# Altium PCB AC-DC24.PcbDoc
Units mm, origin at the board's own origin, x right, y up, seen from the top; angles counter-clockwise.
Board outline 88.02 x 101.24 mm, 4 copper layers (Top Layer, Layer 1, Layer 2, Bottom Layer), stack 0.603 mm thick; 34 components, 23 nets, 97 pads, 158 vias.
Unrouted connection lines stored in the file: 1.
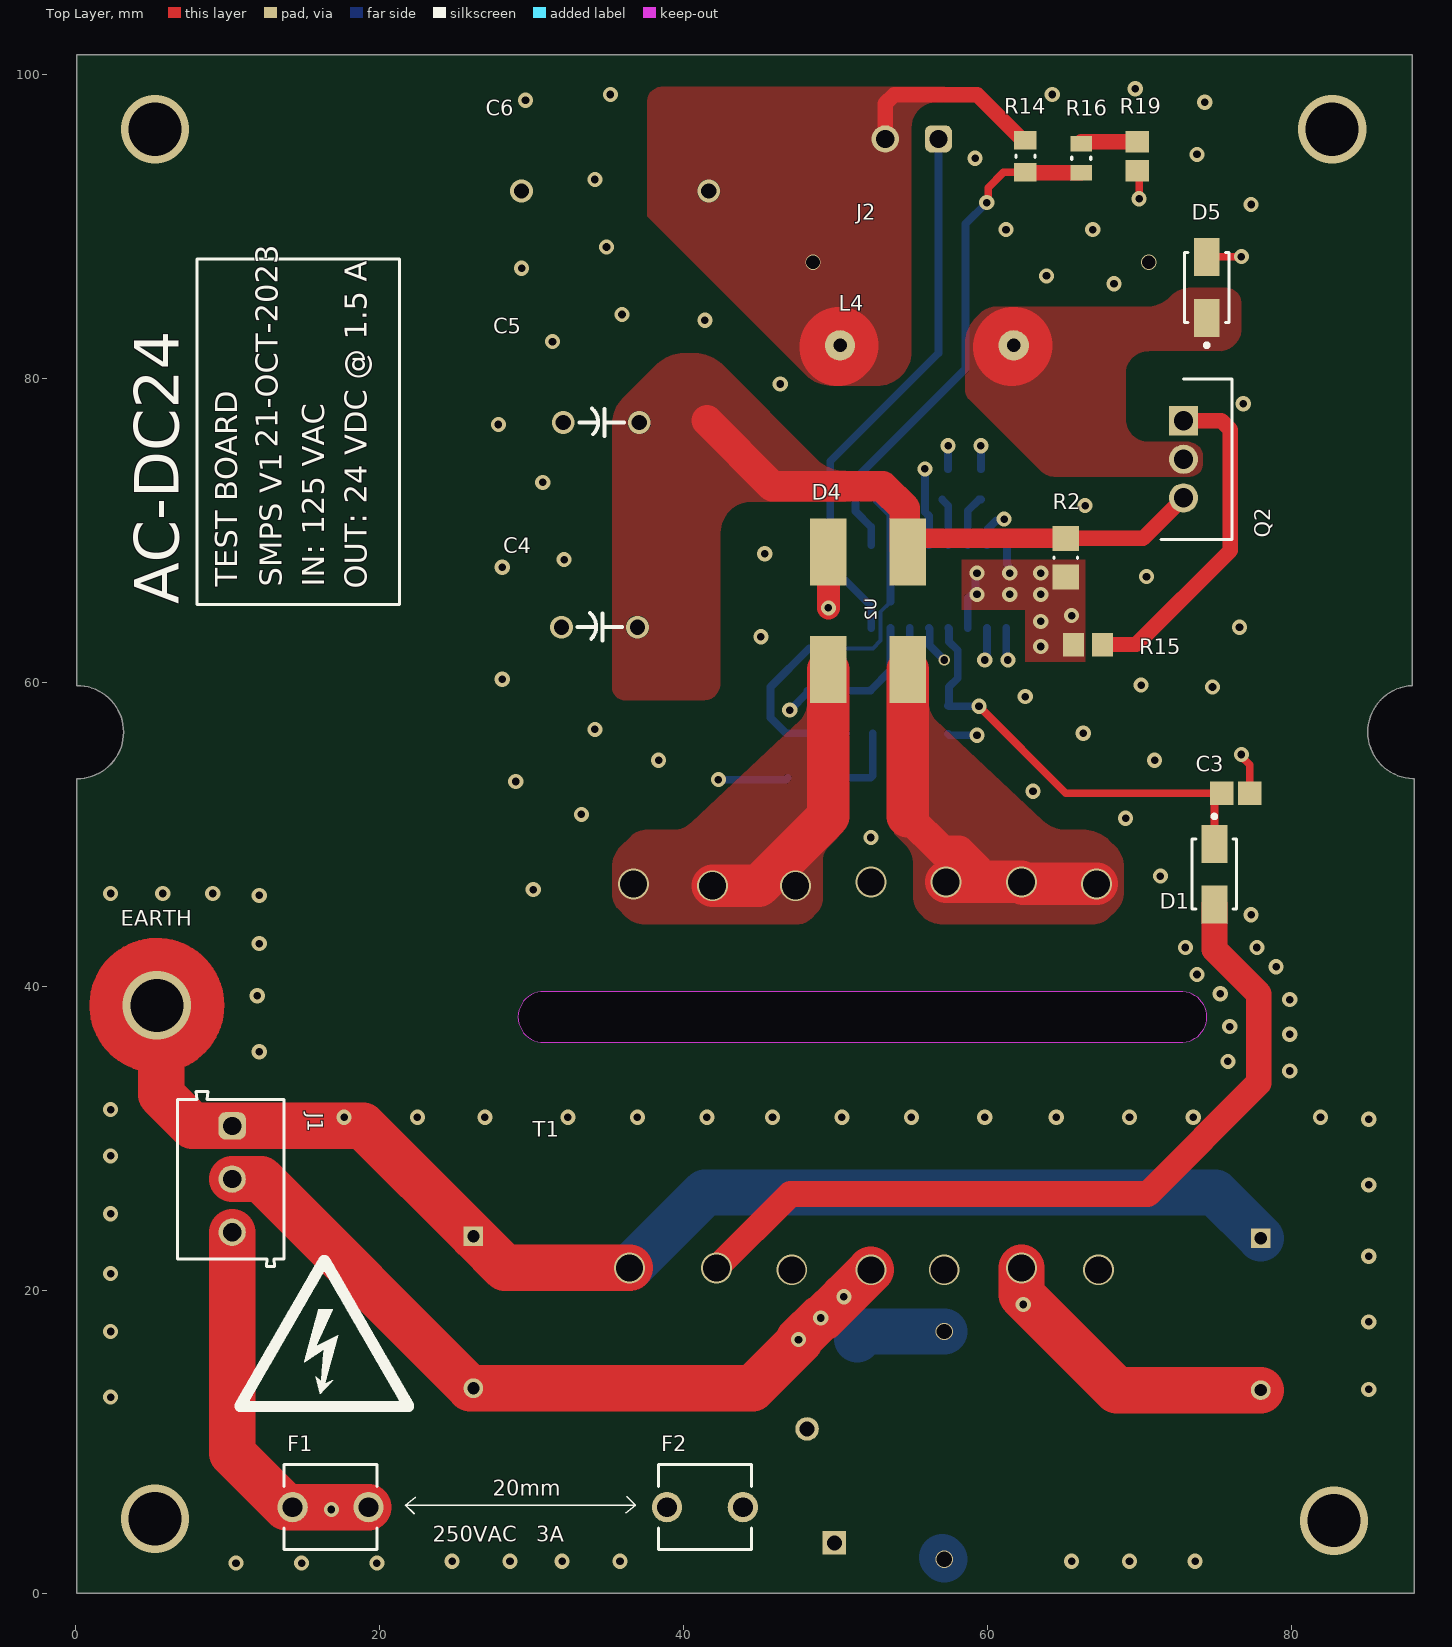
[diagram p0: Top Layer view]
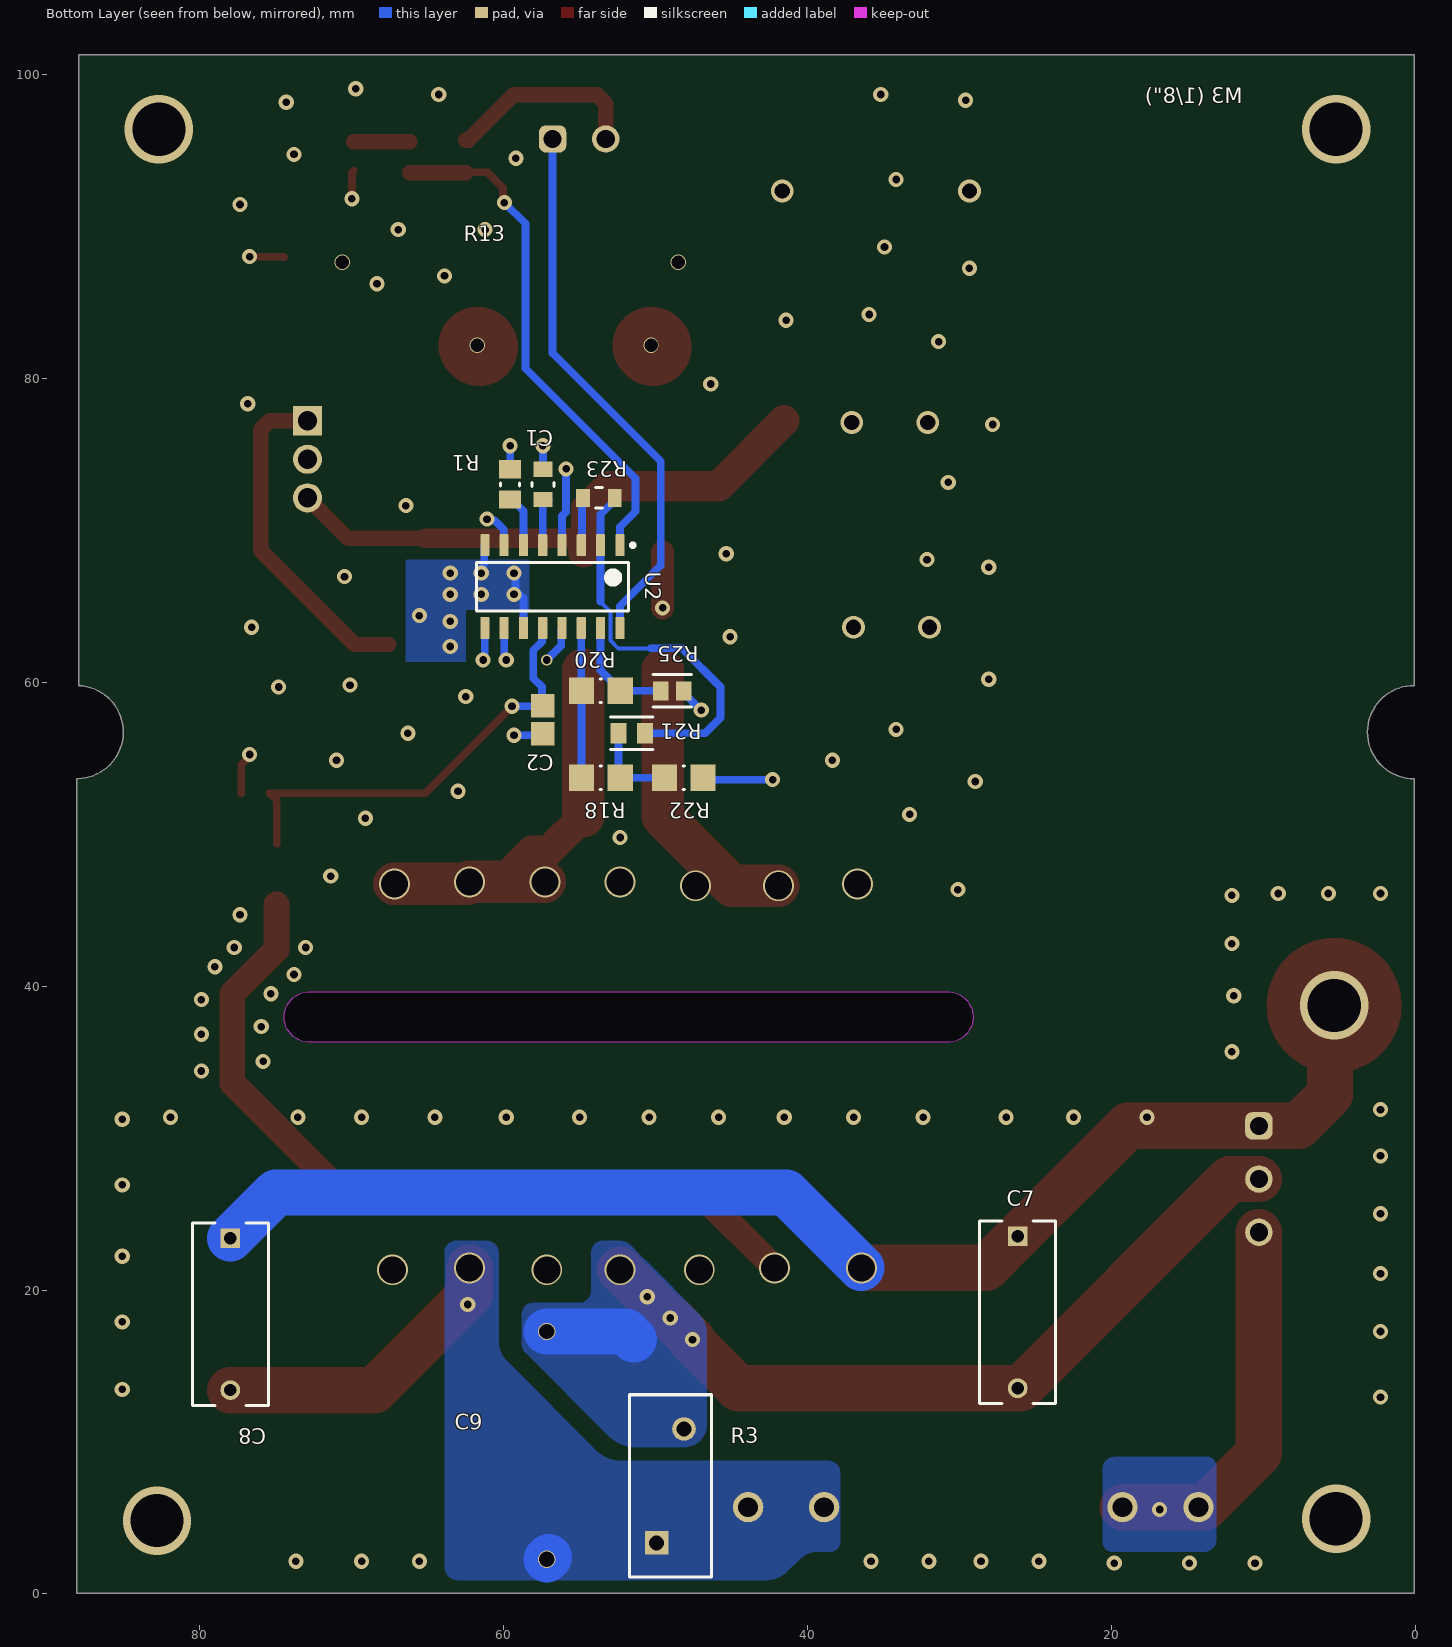
[diagram p1: Bottom Layer view, seen from below]
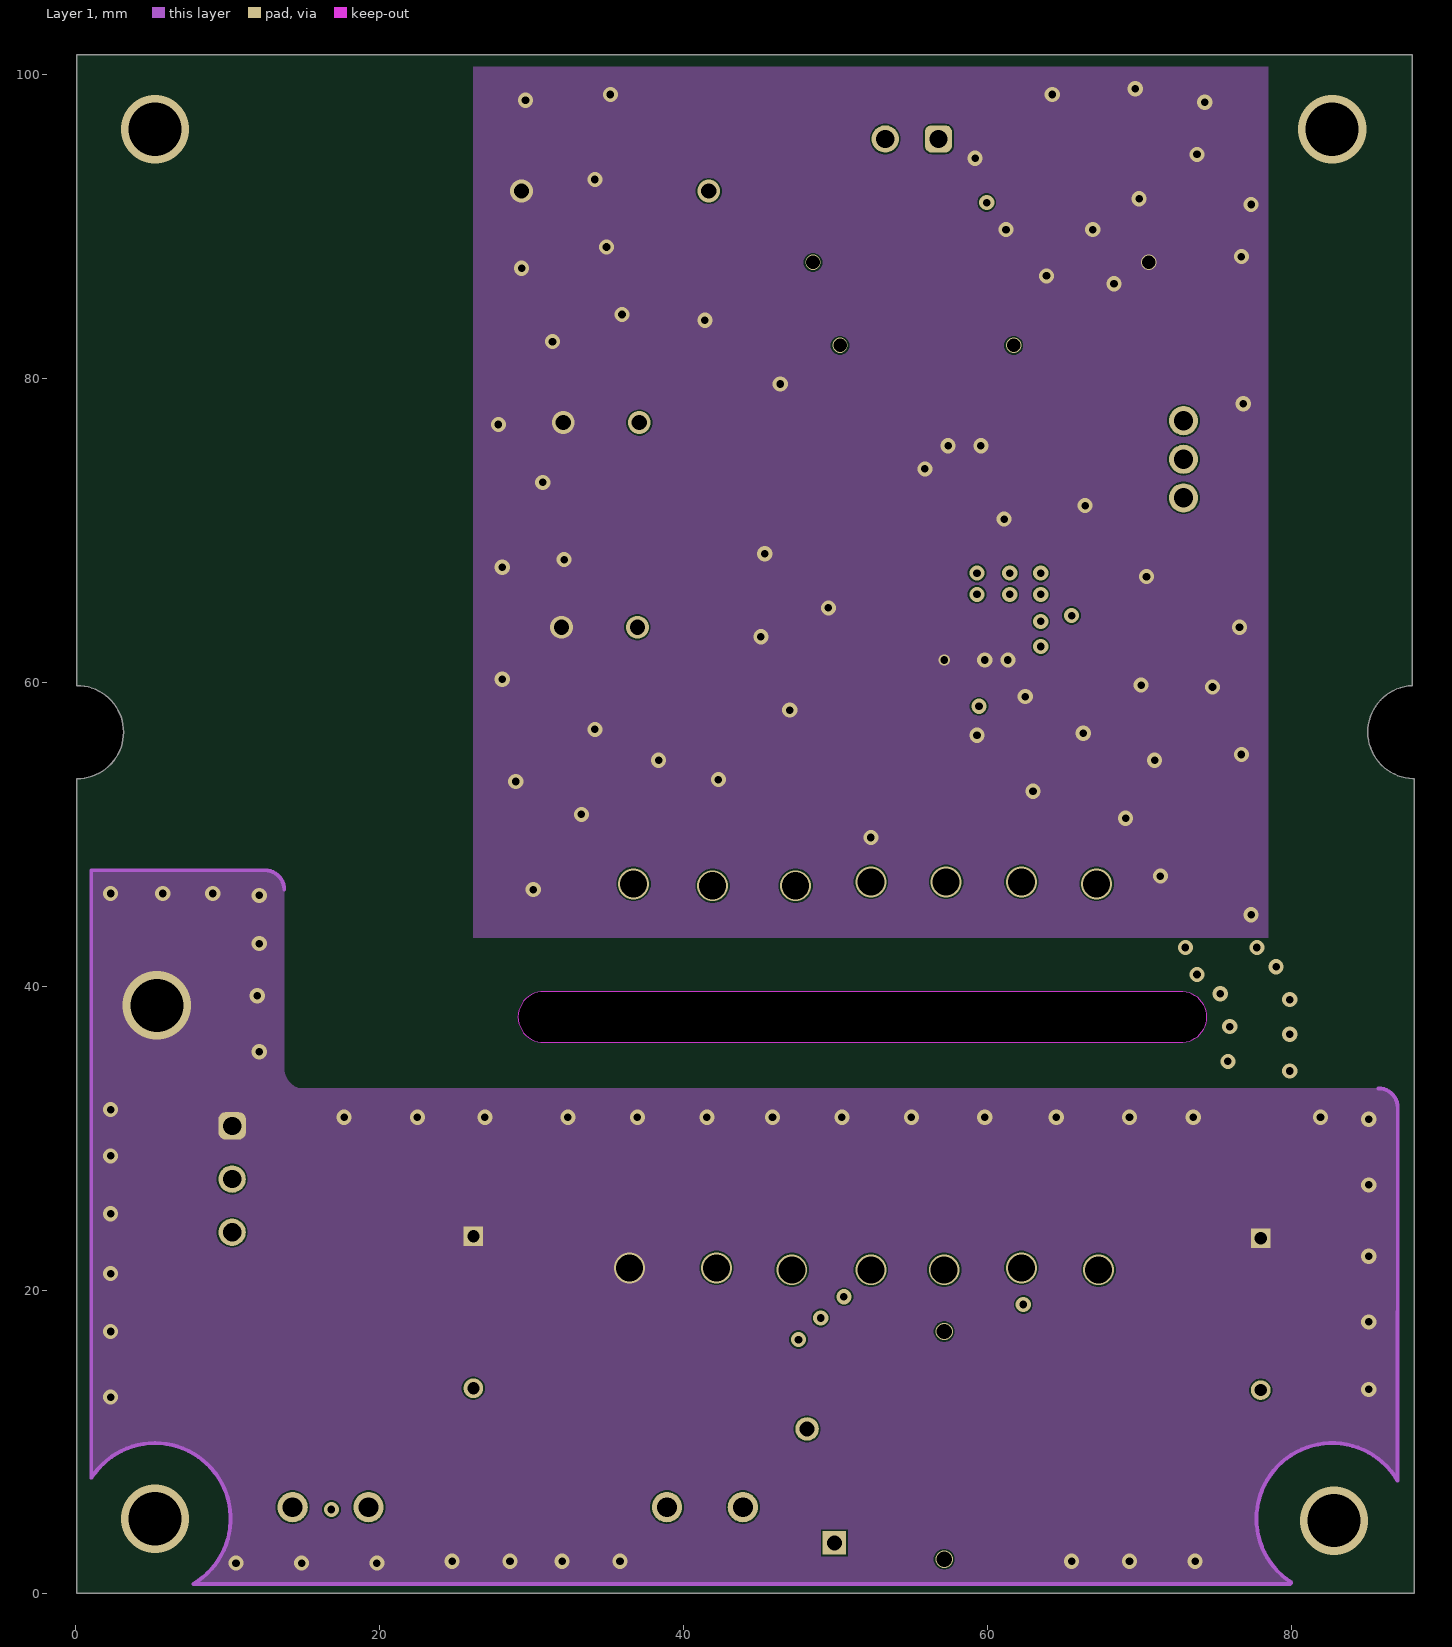
[diagram p2: Layer 1]
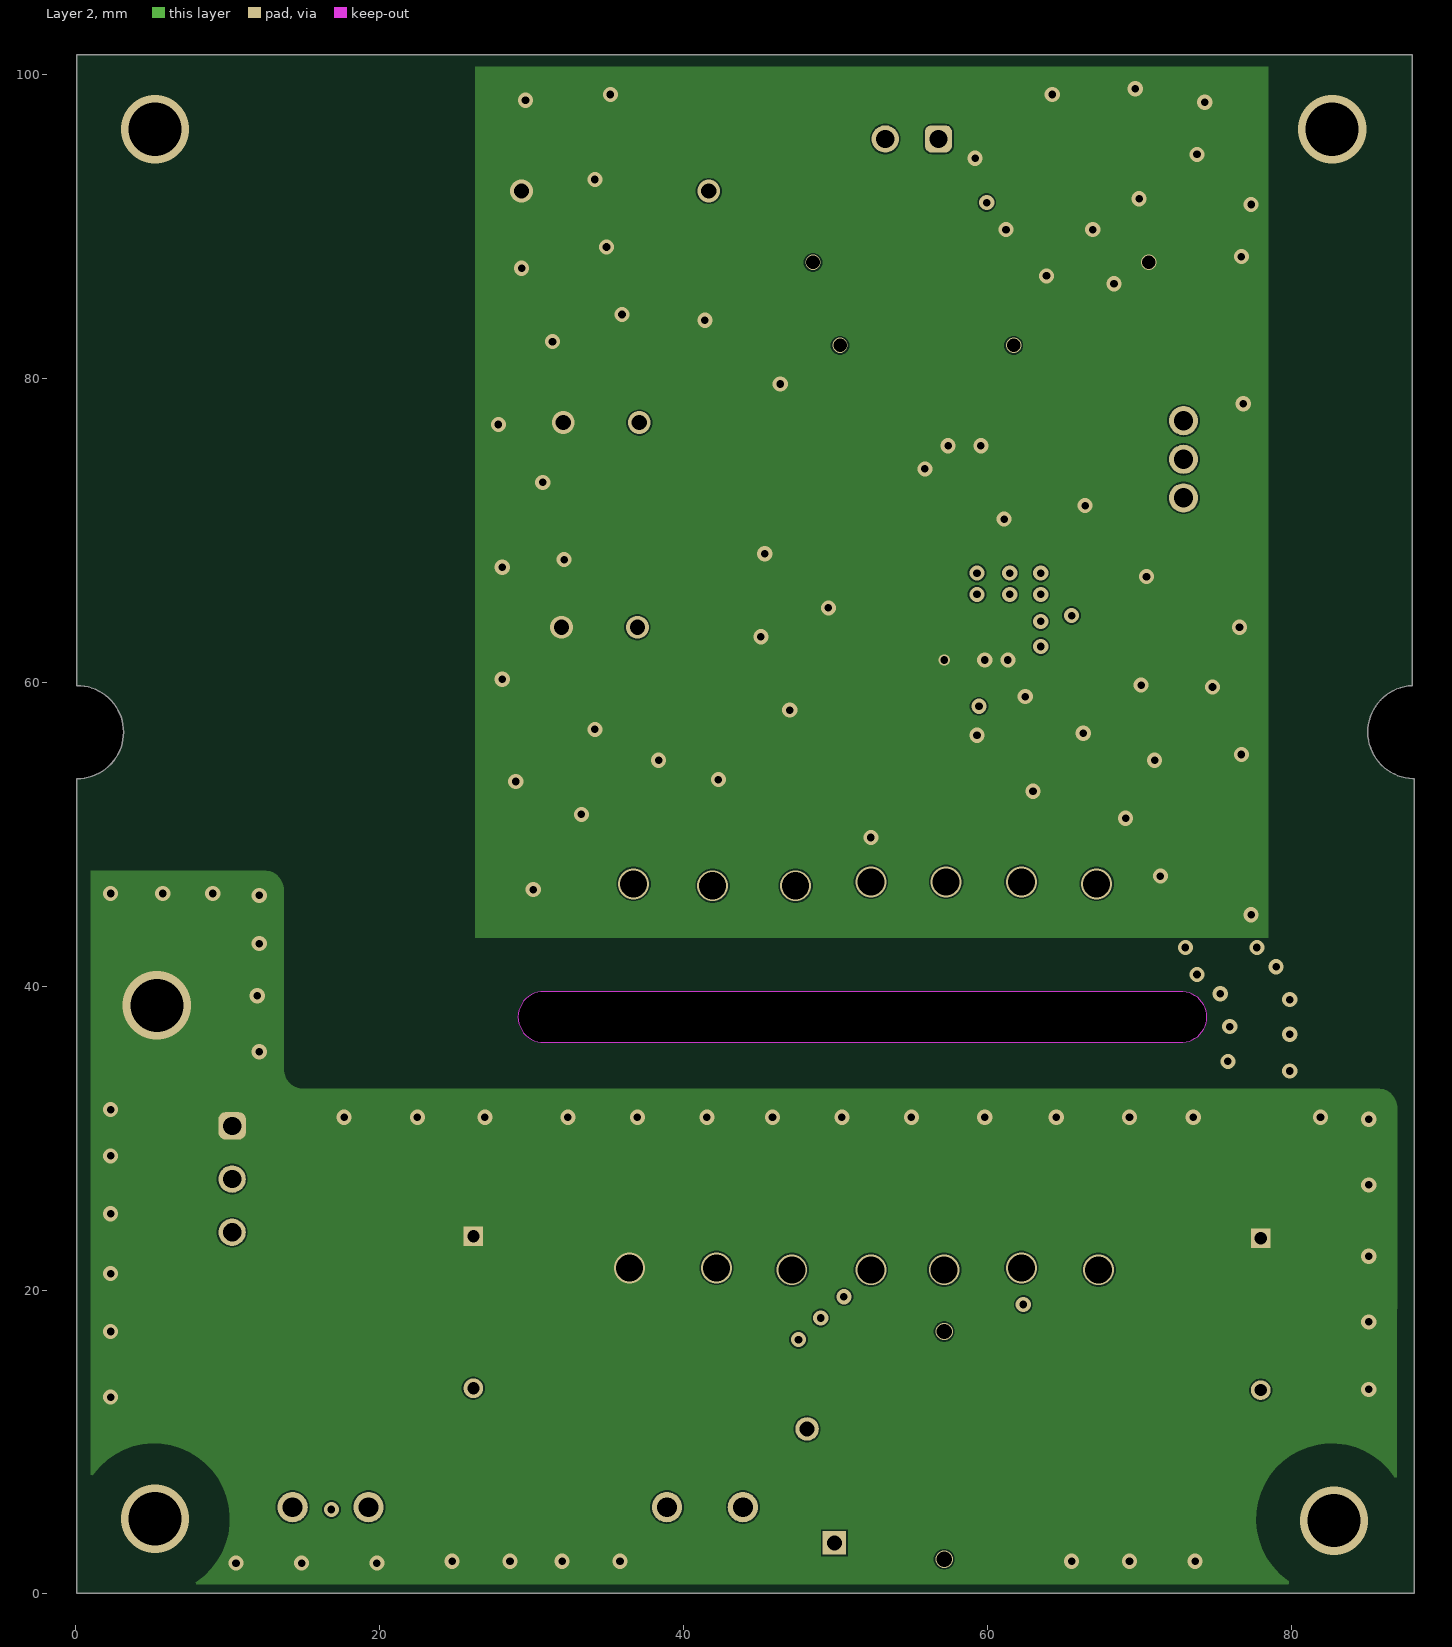
[diagram p3: Layer 2]
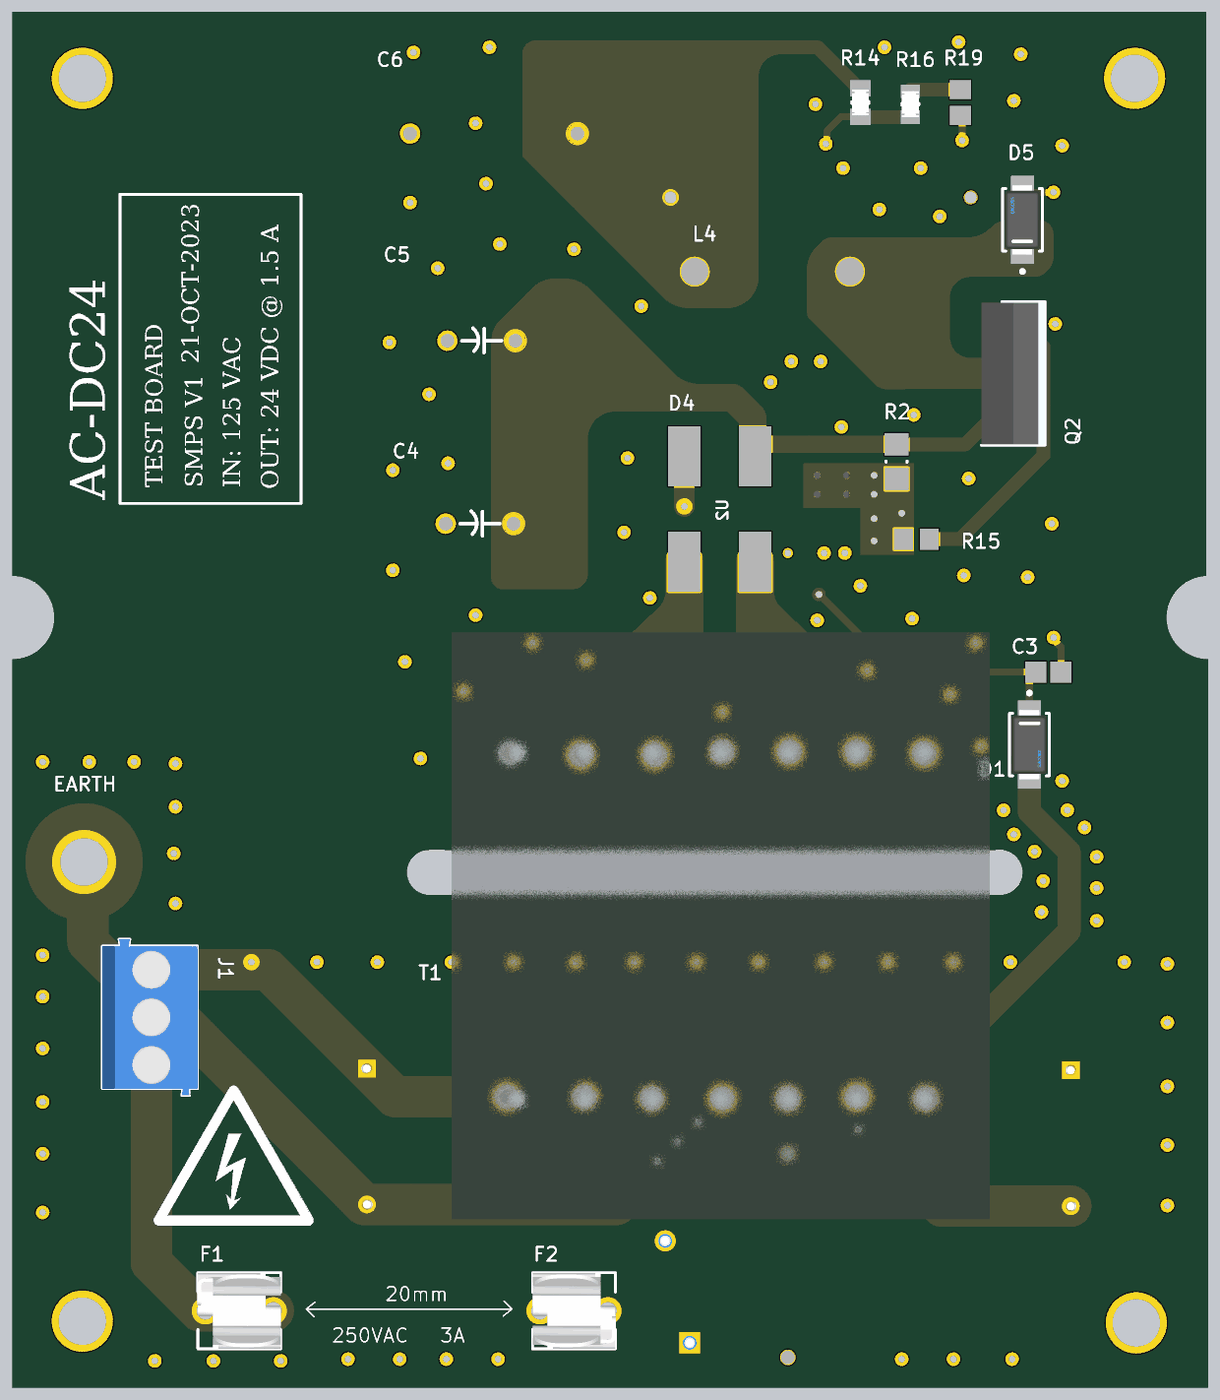
[diagram p4: 3D render of the assembled board from above, using the file's embedded part models]
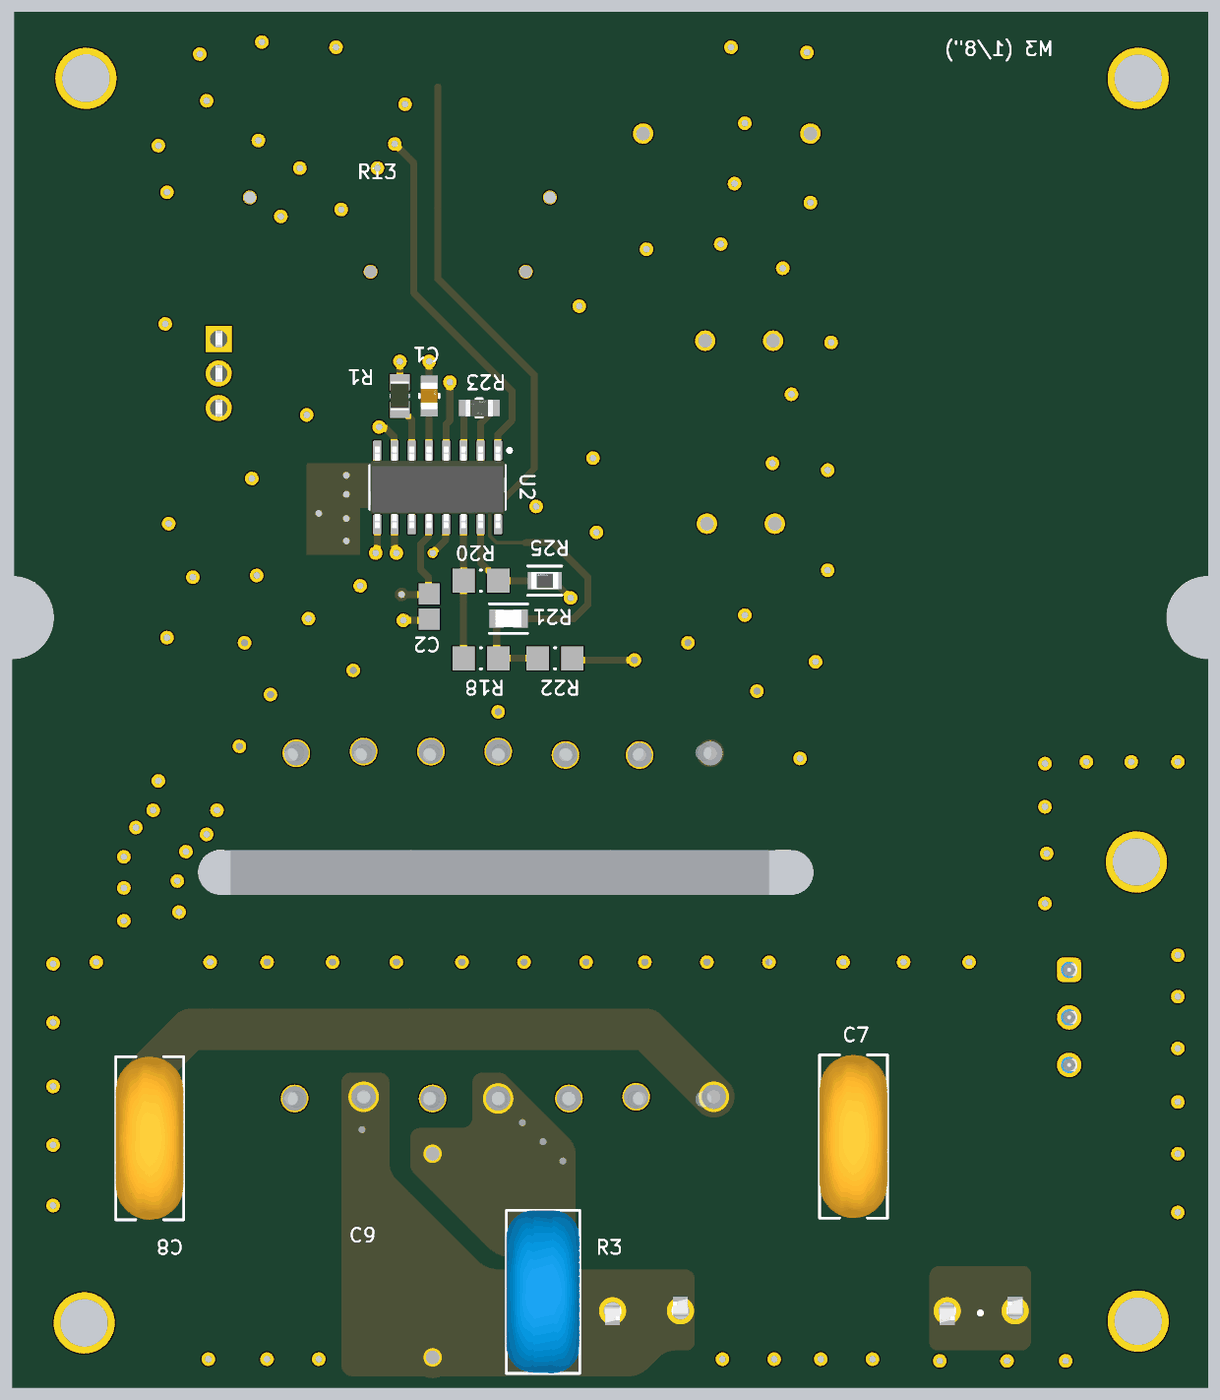
[diagram p5: 3D render of the assembled board from below, using the file's embedded part models]

## Layer stack, top to bottom
Top Solder: solder mask 0.0102, Solder Resist, Dk 3.5
Top Layer: signal copper 0.0356
Dielectric 2: prepreg 0.0711, PP-006, Dk 4.1
Layer 1: signal copper 0.035
Dielectric 1: dielectric 0.32, FR-4, Dk 4.8
Layer 2: signal copper 0.035
Dielectric 3: prepreg 0.0711, PP-006, Dk 4.1
Bottom Layer: signal copper 0.0356
Bottom Solder: solder mask 0.0102, Solder Resist, Dk 3.5

## Board outline
0.064,0.051 0.064,53.657 ccw(c0.079,56.721) 3.143,56.721 ccw(c0.079,56.721) 0.064,59.785 0.064,101.295 87.947,101.295 87.947,59.782 ccw(c88.087,56.721) 88.002,53.658 88.082,53.657 88.082,0.064 87.973,0.051
cut-out: 30.612,36.321 72.644,36.321 ccw(c72.776,37.973) 74.433,37.973 ccw(c72.776,37.973) 72.644,39.624 33.406,39.624 30.612,39.624 ccw(c30.756,37.973)

## Design rules (kind name [scope] priority, off if disabled: settings)
Clearance [All] p1: gap=0.102 ignorepadtopadclearanceinfootprint=TRUE
Clearance Clearance_1 [InNet('sec+') vs InNet('sec+')] p2: gap=0 ignorepadtopadclearanceinfootprint=TRUE
ComponentClearance [All] p1: gap=0.025 collisioncheckmode=3 verticalgap=0.025 showdistances=FALSE donotcheckwithout3dbody=TRUE
Height [All] p1: minheight=0 maxheight=100 prefheight=10
PlaneConnect PlaneConnect_1 [All] p1: planeconnectstyle=Relief reliefexpansion=0.508 reliefentries=4 reliefconductorwidth=0.254 reliefairgap=0.254
PolygonConnect [InNet('vout') vs IsNamedPolygon('NetC24_2_P')] p1: connectstyle=Direct reliefconductorwidth=0.254 reliefentries=4 polygonreliefangle="90 Angle" airgapwidth=0.254
PolygonConnect PolygonConnect_19 [All] p2: connectstyle=Direct reliefconductorwidth=0.254 reliefentries=4 polygonreliefangle="90 Angle" airgapwidth=0.254
RoutingVias [All] p1: holewidth=0.889 width=1.27 viastyle="Through Hole" minholewidth=0.254 minwidth=0.508 maxholewidth=1 maxwidth=2
SolderMaskExpansion [All] p1: expansion=0.102 istentingtop=FALSE
Width [All] p1: maxlimit=5.08 minlimit=0.152 preferedwidth=0.381
27 further rules are at their usual default settings.

## Components (designator, comment, footprint, x,y, rotation, side; value= is the part's Value field where it differs from the comment)
C1 "08051A102JAT2A" FP-0805-L_2_01_0_2-W_1_25-MFG 57.404,73.025 r90 bottom
C2 "08055C223KAZ2A" CAPC2013X94X50ML20T25 57.404,57.531 r90 bottom
C3 "08055C223KAZ2A" CAPC2013X94X50ML20T25 76.327,52.705 r180 top
C4 "UVK1J471MHD1TO" UVK1J471MHD1TO-Footprint-1 36.957,63.627 r180 top value=470µF
C5 "UVK1J471MHD1TO" UVK1J471MHD1TO-Footprint-1 37.084,77.089 r180 top value=470µF
C6 "RGA101M1JBK-1012G" RGA101M1JBK-1012G-Footprint-1 41.656,92.329 r180 top
C7 "VY1222M47Y5UQ6TV0" FP-VY1470-MFG 26.162,18.542 r270 bottom
C8 "VY1222M47Y5UQ6TV0" FP-VY1470-MFG 77.978,18.415 r270 bottom
C9 "B32922C3334M000" B32922C3334M000-Footprint-1 57.15,17.272 r270 bottom value=330nF
D1 "B340A-13-F" FP-SMA-MFG 74.93,47.371 r270 top
D4 "CD-DF408SL" CD-DF408SL-Footprint-1 54.737,68.58 r180 top
D5 "B340A-13-F" FP-SMA-MFG 74.422,85.979 r90 top
F1 "0751.0110" FP-0751_0110-MFG 16.764,5.715 r0 top
F2 "0751.0110" FP-0751_0110-MFG 41.402,5.715 r180 top
J1 "691103110003" 691103110003 10.187,27.305 r270 top
J2 "691103110002" 691103110002 -1214.981,-1174.142 r180 top
L4 "FIT80-1" FIT80-1-Footprint-1 50.292,82.169 r0 top
Q2 "IRF9530NPBF" TO254P469X1042X1967-3P 72.898,77.216 r270 top
R1 "RC0805JR-0710KL" RESC2013X60X35ML10T20 59.563,73.025 r90 bottom
R2 "CRCW08054K00FKTA" RESC3416X05N 65.151,68.194 r90 top value=402R
R3 "B72210S2271K101" FP-B72210S2271K101-MFG 49.022,7.112 r90 bottom value=220pF
R13 "RS02CR5000FB12" RS02CR5000FB12-Footprint-1 48.514,87.63 r0 bottom value=0.5
R14 "CRCW080510K0FKEA" FP-CRCW0805-e3-IPC_A 62.484,94.615 r270 top
R15 "ERA6AEB101V" RESC2013X60X40ML20T25 66.614,62.484 r0 top
R16 "CRCW08051K00JNEA" FP-CRCW0805-e3-IPC_B 66.167,94.488 r270 top
R18 "CRCW08054K00FKTA" RESC3416X05N 53.594,53.721 r0 bottom value=402R
R19 "ERA6AEB101V" RESC2013X60X40ML20T25 69.85,94.615 r90 top
R20 "CRCW08054K00FKTA" RESC3416X05N 53.594,59.436 r0 bottom value=403R
R21 "CR0805JW511E" FP-CR0805-IPC_B 51.562,56.642 r0 bottom
R22 "CRCW08054K00FKTA" RESC3416X05N 48.133,53.721 r180 bottom value=402R
R23 "RT0805BRD0751KL" FP-RT0805-MFG 53.721,72.136 r180 bottom value=513R
R25 "ERA6AEB102V" FP-ERA6A-IPC_C 48.895,59.436 r0 bottom
T1 "WE-750811351" WE-750811248-Footprint-1 67.183,46.609 r270 top
U2 "TL494CDR" D0016A_N 56.785,66.294 r270 bottom

## Footprints (in the part's own frame and the unit in brackets; to place one, negate y for a bottom-side part, rotate by r counter-clockwise, add the part's x,y. Pads: shape width x height; smd on the part's side, far side on the other; paste and mask are expansions set on the pad)
691103110002 [mm] "3,50mm - modular - blue - Horizontal wire entry - Pressure clamp - 8,4mm height - 02p"
  rrect50% 1.8x1.8 hole 1.2: 1(-1271.75,-1269.9)
  round 1.8 hole 1.2: 2(-1268.25,-1269.9)
  body extent -1274,-1273.5 -1266,-1266.5, height 8.45
691103110003 [mm] "3,50mm - modular - blue - Horizontal wire entry - Pressure clamp - 8,4mm height - 03p"
  rrect50% 1.8x1.8 hole 1.2: 1(-3.5,0.1)
  round 1.8 hole 1.2: 2(0,0.1) 3(3.5,0.1)
  silkscreen extent -5.75,-3.5 5.75,3.5, body extent -5.75,-3.5 5.75,3.5, height 8.45
B32922C3334M000-Footprint-1 [mm]
  round 1 smd: Pad5(0,0) Pad6(14.986,0)
  body extent -1.62,-3.18 16.38,2.79, height 10.5
CAPC2013X94X50ML20T25 [mm] "Chip Capacitor, 2-Leads, Body 2.01x1.25mm, IPC Low Density"
  rect 1.55x1.55 smd: 1(-0.925,0) 2(0.925,0)
  body extent -1.1,-0.72 1.11,0.72, height 0.94
CD-DF408SL-Footprint-1 [mm]
  rect 2.4x4.4 smd: 1(0,0) 2(0,7.747) 3(5.207,7.747) 4(5.207,0)
  body extent -1.91,-1.52 7.11,9.4, height 1.4
D0016A_N [mm] "SOIC, 16-Leads, Body 10x4mm, Pitch 1.27mm, IPC Medium Density"
  rrect17% 1.45x0.6 smd: 1(-2.725,4.445) 2(-2.725,3.175) 3(-2.725,1.905) 4(-2.725,0.635) 5(-2.725,-0.635) 6(-2.725,-1.905) 7(-2.725,-3.175) 8(-2.725,-4.445) 9(2.725,-4.445) 10(2.725,-3.175) 11(2.725,-1.905) 12(2.725,-0.635) 13(2.725,0.635) 14(2.725,1.905) 15(2.725,3.175) 16(2.725,4.445)
  silkscreen extent -2.85,-5 1.6,5.42, body extent -3,-4.95 3,4.95, height 1.59
FIT80-1-Footprint-1 [mm]
  round 2 smd: 0(0,0) 1(11.43,0)
  body extent -6.67,-7.94 18.1,7.94, height 27.94
FP-0751_0110-MFG [mm]
  round 2 hole 1.3 paste-2539.97 mask+0: 1(-2.5,0) 1(2.5,0)
  silkscreen extent -3.05,-2.8 3.05,2.8, body extent -3.6,-2.9 3.6,2.9, height 0.25
FP-0805-L_2_01_0_2-W_1_25-MFG [mm]
  rect 1x1.25 smd paste+0 mask+0: 1(-1,0) 2(1,0)
  silkscreen extent -0.13,-0.72 0.13,0.72, body extent -1,-0.63 1,0.63, height 0.94
FP-B72210S2271K101-MFG [mm]
  rect 1.55x1.55 hole 1 paste-2539.97 mask+0: 1(-3.75,0.9)
  round 1.55 hole 1 paste-2539.97 mask+0: 2(3.75,-0.9)
  silkscreen extent -6,-2.7 6,2.7, body extent -6,-2.7 6,2.7, height 14.5
FP-CR0805-IPC_B [mm]
  rect 1.058x1.362 smd paste+0 mask+0: 1(-0.877,0) 2(0.877,0)
  silkscreen extent -1.41,-1.08 1.41,1.08, body extent -1,-0.63 1,0.63, height 0.6
FP-CRCW0805-e3-IPC_A [mil]
  rect 47.5x59.38 smd paste+0 mask+0: 1(-41.37,0) 2(41.37,0)
  silkscreen extent -3,-25 3,25, body extent -39,-25 39,25, height 20
FP-CRCW0805-e3-IPC_B [mm]
  rect 1.007x1.408 smd paste+0 mask+0: 1(-0.951,0) 2(0.951,0)
  silkscreen extent -0.07,-0.63 0.07,0.63, body extent -1,-0.63 1,0.63, height 0.5
FP-ERA6A-IPC_C [mm]
  rect 1.005x1.262 smd paste+0 mask+0: 1(-0.751,0) 2(0.751,0)
  silkscreen extent -1.25,-1.07 1.25,1.07, body extent -1,-0.63 1,0.63, height 0.6
FP-RT0805-MFG [mm]
  rect 0.9x1.2 smd paste+0 mask+0: 1(-1.05,0) 2(1.05,0)
  silkscreen extent -0.23,-0.67 0.23,0.67, body extent -1,-0.63 1,0.63, height 0.6
FP-SMA-MFG [mm]
  rect 2.5x1.7 smd paste+0 mask+0: 1(-2,0) 2(2,0)
  silkscreen extent -3.92,-1.46 2.3,1.46, body extent -2.6,-1.3 2.6,1.3, height 2.4
FP-VY1470-MFG [mm]
  rect 1.3x1.3 hole 0.8 paste-2539.97 mask+0: 1(-5,0)
  round 1.3 hole 0.8 paste-2539.97 mask+0: 2(5,0)
  silkscreen extent -6,-2.5 6,2.5, body extent -5.98,-2.5 5.98,2.5, height 16
RESC2013X60X35ML10T20 [mm] "Chip Resistor, 2-Leads, Body 2.1x1.35mm, IPC Low Density"
  rect 1.2x1.45 smd: 1(-1,0) 2(1,0)
  silkscreen extent -0.1,-0.63 0.1,0.63, body extent -1.05,-0.68 1.05,0.67, height 0.6
RESC2013X60X40ML20T25 [mm] "Chip Resistor, 2-Leads, Body 2.00x1.25mm, IPC Low Density"
  rect 1.4x1.55 smd: 1(-0.95,0) 2(0.95,0)
  body extent -1.1,-0.72 1.1,0.72, height 0.6
RESC3416X05N [mm] "Chip Resistor, 2-Leads, Body 3.40x1.60mm, IPC Medium Density"
  rect 1.65x1.75 smd: 1(-1.275,0) 2(1.275,0)
  silkscreen extent -0.05,-0.77 0.05,0.77, body extent -1.75,-0.87 1.75,0.87, height 0.5
RGA101M1JBK-1012G-Footprint-1 [mm]
  round 1 smd: 1(0,0) 2(12.319,0)
  body extent -1.9,-8 14.1,8, height 20
RS02CR5000FB12-Footprint-1 [mm]
  body extent 3.43,-3 19.43,3, height 6
TO254P469X1042X1967-3P [mm]
  rect 1.92x1.92 / inner round 1.92 / far side rect 1.92x1.92 hole 1.28: 1(0,0)
  round 1.92 hole 1.28: 2(2.54,0) 3(5.08,0)
  silkscreen extent -2.73,-1.5 7.81,3.19, body extent -2.67,-1.5 7.75,3.19, height 18.84
UVK1J471MHD1TO-Footprint-1 [mm]
  round 1 smd: 1(0,0) 2(5,0)
  silkscreen extent 1.02,-0.92 3.94,0.89, body extent -3.84,-6.25 8.66,6.25, height 20
WE-750811248-Footprint-1 [mm]
  round 1 smd: 1(25.273,0.381) 2(25.146,-4.953) 3(25.273,-9.779) 4(25.273,-14.859) 5(25.273,-20.066) 6(25.273,-25.273) 7(25.146,-30.734) 8(-0.127,-30.48) 9(0,-25.273) 10(0,-19.812) 11(0,-14.859) 12(0,-9.779) 13(0,-4.699) 14(0,0.381)
  body extent -9.02,-34.77 34.16,4.83, height 31.97

## Part data
C1: library part CMP-2007-04527-2, "General Purpose Ceramic Capacitor, 0805, 1nF, 5%, C0G, 30ppm/°C, 100V", Capacitance=1nF, Case Code (Imperial)=0805, Case Code (Metric)=2012, Dielectric=C0G, Dielectric Material=Ceramic, Insulation Resistance=100GR, Max Operating Temperature=125°C, Min Operating Temperature=-55°C, Package Quantity=1, Temperature Coefficient=30ppm/°C, Tolerance=5%, Voltage=100V, Case/Package=0805, Contact Plating=Tin, Depth=1.25mm, Dissipation Factor=2.5%, Height=0.94mm, Lead Free="Lead Free", Length=2.01mm, Mount="Surface Mount", Number of Pins=2, Packaging="Tape and Reel", Radiation Hardening=No, REACH SVHC="No SVHC", RoHS Compliant=Yes, Termination=SMD/SMT, Thickness=0.037inch, Voltage Rating=100V, Voltage Rating (DC)=100V, Width=1.25mm
C2 C3: library part CMP-2007-04398-1, Capacitance=22uF, Dielectric=XR7, Manufacturer="AVX Interconnect / Elco", Voltage Rating=50V, Material=Ceramic, Part Number=08055C223KAZ2A
C4 C5: library part CMP-001-00087-2, "Cap Alum 470UF 20% 63V Radial", Capacitor Type=Electrolytic, Dielectric Material=Aluminium, Max Operating Temperature=85°C, Min Operating Temperature=-40°C, Ripple Current=900mA, Voltage Rating=63V, Diameter=12.5mm, Pins=2, RoHS Compliant=Yes
C6: library part CMP-001-00089-1, "Aluminum Electrolytic Capacitors - Leaded 63V 100uF 105C 10x12.5 mm", Capacitance=100uF, Voltage Rating=63V
C7 C8: library part CMP-02417-000069-1, "CAP CER 2200PF 760VAC Y5U RADIAL", Capacitance=2.2nF, Case/Package=Radial, Dielectric=Y5U, Max Operating Temperature=125°C, Min Operating Temperature=-40°C, Package Quantity=500, Ratings=X1, Resistor Type=Ceramic, Safety rating=Y1, Tolerance=20%, Voltage=500V, Construction=RADIAL, Contact Plating=Tin, Depth=5mm, Diameter=12mm, Height=15mm, Height - Seated (Max)=0.63inch, Lead Diameter=0.6mm, Lead Free="Lead Free", Lead Pitch=10mm, Lead/Base Style=Kinked, Mount="Through Hole", Packaging="Tape and Reel", Radiation Hardening=No, RoHS Compliant=Yes, Series=VY1, Termination=Radial, Thickness=5mm, Voltage Rating (AC)=500V, Voltage Rating (DC)=500V, Width=5mm
C9: library part CMP-001-00088-1, "Film Capacitor, Polypropylene, 630V, 20% +Tol, 20% -Tol, 0.33uF, Through Hole Mount", Capacitor Type=FILM, Case/Package=7155, Dielectric Material=Polypropylene, Max Operating Temperature=110°C, Min Operating Temperature=-40°C, Safety rating=X2, Height=8mm, Mounting Technology="Through Hole", Pins=2, RoHS Compliant=Yes
D1 D5: library part CMP-1667-00003-3, "DIODE SCHOTTKY 40V 3A SMA", Average Rectified Current=3A, Capacitance=250pF, Case/Package=SMA, Forward Voltage=500mV, Max Forward Surge Current (Ifsm)=80A, Max Operating Temperature=125°C, Max Repetitive Reverse Voltage (Vrrm)=40V, Max Reverse Current=500uA, Min Operating Temperature=-55°C, Package Quantity=5000, Contact Plating=Tin, Current=3A, Current Rating=3A, Element Configuration=Single, Forward Current=3A, Height=2.3mm, Lead Free="Lead Free", Length=4.6mm, Max Reverse Voltage (DC)=40V, Mount="Surface Mount", Number of Pins=2, Output Current=3A, Packaging="Tape and Reel", Peak Non-Repetitive Surge Current=80A, Polarity=Standard, Radiation Hardening=No, REACH SVHC="No SVHC", RoHS Compliant=Yes, Series=-, Termination=SMD/SMT, Voltage=40V, Voltage Rating (DC)=40V, Weight=0.002258oz, Width=2.92mm
D4: library part CMP-004-00034-1, "Bridge Rectifier Diode, 1 Phase, 4A, 800V V(RRM), Silicon", Forward Current=4A, Forward Voltage=860mV, Max Operating Temperature=175°C, Max Surge Current=150A, Min Operating Temperature=-55°C, Diode Type=RECTIFIER, JESD-609 Code=e3, Mounting Technology=Flat, Reach SVHC Compliant=No, RoHS Compliant=Yes
F1 F2: library part CMP-26292-000006-1, "FUSE CLIP CARTRIDGE 10A PCB", Ambient Temperature Range High=+85°C, Ambient Temperature Range Low=-40°C, Fuse Current=10A, Manufacturer=Schurter, Package=0, Voltage Rating Ac=500V, Automotive=No, Category=Fuse, ComponentLink2Description=Datasheet, ComponentLink2URL=https://us.schurter.com/bundles/snceschurter/epim/_ProdPool_/newDS/en/typ_OG__Clip__5x20.pdf, Conn Orientation=Horizontal, Device Class L1="Circuit Protection", Device Class L2="Fuse Holders", Device Class L3=unset, Digikey Description="FUSE CLIP CARTRIDGE 10A PCB", Height=8.9mm, Lead Free=Yes, Manufacturer Part Number=0751.0110, Number Of Fuses=1, Octopart=https://octopart.com/0751.0110-schurter-19402, RoHS=TRUE, Voltage Rating Dc=500V
J1: library part CMP-1502-03255-2, Color=Blue, Current Rating=10A, Voltage Rating=125V, Contact Material=Brass, Height=12.2mm, Housing Material=Nylon, Lead Pitch=3.5mm, Length=7mm, NexarPartId=18818287, Number of Contacts=3, Number of Levels=1, Number of Pins=3, Number of Positions Per Level=3, Packaging=Box, Pitch=3.5052mm, REACH SVHC=Unknown, RoHS=Compliant, Stripping Length=-6mm, Termination=Screw, Width=11.5mm, Wire/Cable Gauge=26AWG
J2: library part CMP-1502-03254-2, Color=Blue, Current=10A, Max Operating Temperature=105°C, Min Operating Temperature=-40°C, Voltage=125V, Contact Material="Brass, Copper, Nickel, Tin, Zinc", Contact Plating=Tin, Current Rating=10A, Height=8.5mm, Housing Material=Nylon, Lead Pitch=3.5mm, Length=7mm, Mount="Through Hole", NexarPartId=18818286, Number of Contacts=2, Number of Levels=1, Number of Pins=2, Number of Positions Per Level=2, Number of Rows=1, Packaging=Box, Pitch=3.5052mm, Plating=Steel, REACH SVHC=Unknown, RoHS=Compliant, Stripping Length=-6mm, Termination=Screw, Voltage Rating=125V, Width=8mm, Wire Gauge (Max)=26AWG, Wire Gauge (Min)=16AWG, Wire/Cable Gauge=26AWG
L4: library part CMP-006-00026-3, "General Purpose Inductor, 128uH, 1 Element, 9863", Case/Size Code=9863, DC Resistance (DCR)=95.2mR, Inductance-Nom (L)=128uH, Max Current Rating=4A, Construction=Toroidal, Pins=2, RoHS Compliant=Yes
Q2: library part CMP-033-000000-2, "MOSFET MOSFT PCh -100V -14A 200mOhm 38.7nC", Manufacturer_Name=Infineon, Mouser Part Number=942-IRF9530NPBF, Datasheet Link=https://www.infineon.com/dgdl/irf9530npbf.pdf?fileId=5546d462533600a401535611b9931dc1, Design Item ID=IRF9530NPBF, Geometry.Height=4.69mm, Manufacturer_Part_Number=IRF9530NPBF, Mouser Price/Stock=https://www.mouser.co.uk/ProductDetail/Infineon-Technologies/IRF9530NPBF?qs=9%252BKlkBgLFf2oWmEcBf5aZQ%3D%3D, Source=IRF9530NPBF.SchLib
R1: library part CMP-2000-05025-1, "Chip Resistor, 10 KOhm, +/- 5%, 0.125 W, -55 to 155 degC, 0805 (2012 Metric), RoHS, Tape and Reel", Manufacturer=Yageo, Package Description="2-Pin Surface Mounted Device, Body 2 x 1.25 mm", Package Reference=805, Power=0.125mW, Power Rating=250mW, Resistance=103R, Resistance Tolerance=±5%, Resistor Case Style=0805[2012Metric], Resistor Element Type=ThickFilm, Temperature Coefficient=±100ppm/degC, Voltage Rating=150V, Automotive Qualification Standard=-, Datasheet URL=http://www.yageo.ru/pdf/RC0805.pdf, Datasheet Version="REV. 2, 09/2004", Manufacturer URL=http://www.yageo.com/, MSL=MSL1-Unlimited, Packaging=CutTape, Product Range=RCSeries, SVHC=ToBeAdvised
R2 R18 R20 R22: library part CMP-009-00184-1, "RES SMD 4K OHM 1% 1/8W 0805", Case/Package=0805, Manufacturer Series=CRCW, Max Operating Temperature=155°C, Min Operating Temperature=-55°C, Power=125mW, Tolerance=1%, JESD-609 Code=e0, Mounting Technology="Surface Mount", Pins=2, RoHS Compliant=No
R3: library part CMP-10618-000003-1, "VARISTOR 430V 3.5KA DISC 10MM", Capacitance=220pF, Clamping Current="25A clamp", Clamping Voltage="710V clamp", Manufacturer=EPCOS, Package=0, Temperature="-40°C to +105°C", Temperature Range High=+105°C, Temperature Range Low=-40°C, Varistor Voltage=430V, Voltage Rating Ac=275V, Voltage Rating Dc=350V, Voltage Tolerance=10%, Automotive=No, Category=Res, ComponentLink2Description=Datasheet, ComponentLink2URL=https://www.tdk-electronics.tdk.com/inf/70/db/var/SIOV_Leaded_AdvanceD.pdf, Device Class L1="Circuit Protection", Device Class L2=Varistors, Device Class L3=unset, Digikey Description="VARISTOR 430V 3.5KA DISC 10MM", Height=14.5mm, Lead Free=Yes, Manufacturer Part Number=B72210S2271K101, Mouser Description="B722 Series 350 V 275 Vrms 710 V Clamp 3500 A 220 pF AdvanceD Leaded Varistor", Octopart=https://octopart.com/b72210s2271k101-epcos-42227876, RoHS=TRUE
R13: library part CMP-009-00190-2, "Fixed Resistor, Wire Wound, 2.5W, 0.5ohm, 1% +/-Tol, 90ppm/Cel, Through Hole Mount", Manufacturer Series=RS, Max Operating Temperature=250°C, Min Operating Temperature=-65°C, Power=2.5W, Tolerance=1%, Additional Feature=PRECISION, JESD-609 Code=e0, Mounting Technology="Through Hole", Pins=2, RoHS Compliant=No
R14: library part CMP-2001-04908-2, "RES Thick Film, 10kΩ, 1%, 0.125W, 100ppm/°C, 0805", Case Code (Imperial)=0805, Case Code (Metric)=2012, Max Operating Temperature=155°C, Min Operating Temperature=-55°C, Package Quantity=5000, Power Rating=125mW, Resistance=103R, Temperature Coefficient=100ppm/°C, Tolerance=1%, Voltage Rating=150V, Case/Package=0805, Composition="Thick Film", Contact Plating=Tin, Depth=1.25mm, Height=0.45mm, Lead Free="Lead Free", Length=2mm, Military Standard=Not, Packaging="Tape and Reel", Radiation Hardening=No, Termination=SMD/SMT, Voltage Rating (DC)=150V, Weight=0.000194oz, Width=1.25mm
R15: library part CMP-2001-00580-1, Manufacturer=Panasonic, Power Rating=0.125W, Resistance=101R, Part Number=ERA6AEB101V
R16: library part CMP-2001-03597-2, "RES Thick Film, 1kΩ, 5%, 0.125W, 200ppm/°C, 0805", Case Code (Imperial)=0805, Case Code (Metric)=2012, Max Operating Temperature=155°C, Max Power Dissipation=125mW, Min Operating Temperature=-55°C, Package Quantity=1, Resistance=102R, Temperature Coefficient=200ppm/°C, Tolerance=5%, Voltage Rating=150V, Case/Package=0805, Composition="Thick Film", Contact Plating=Tin, Depth=1.25mm, Features="Automotive AEC-Q200", Height=0.02inch, Lead Free="Lead Free", Length=2mm, Military Standard=Not, Mount="Surface Mount", Number of Pins=2, Number of Terminations=2, Packaging="Tape and Reel", Power Rating=125mW, Radiation Hardening=No, Termination=SMD/SMT, Voltage Rating (DC)=150V, Weight=0.000194oz, Width=1.25mm
R19: library part CMP-2001-00580-1, Manufacturer=Panasonic, Power=125mW, Resistancemeter 1=101R, Part Number=ERA6AEB101V
R21: library part CMP-07231-001106-1, "Thick Film Chip Resistors 0805 510Ω 0.125W 5% 200ppm/°C", Case Code (Imperial)=0805, Case Code (Metric)=2012, Max Operating Temperature=155°C, Min Operating Temperature=-55°C, Package Quantity=5000, Power Rating=125mW, Resistance=510R, Temperature Coefficient=200ppm/°C, Tolerance=5%, Voltage Rating=150V, Case/Package=0805, Height=0.5mm, Length=2mm, Packaging="Tape and Reel", Termination=SMD/SMT, Thickness=508um, Width=1.25mm
R23: library part CMP-03412-030464-1, "RES SMD 51K OHM 0.1% 1/8W 0805", Manufacturer=Yageo, Package=RT0805, Power Rating=0.125W, Resistance=51k, Temperature="-55°C to +155°C", Temperature Coefficient="25 ppm/°C", Temperature Range High=+155°C, Temperature Range Low=-55°C, Tolerance=0.0025, Voltage Rating=150V, Automotive=No, Category=Res, ComponentLink2Description=Datasheet, ComponentLink2URL=http://www.yageo.com/documents/recent/PYu-RT_1-to-0.01_RoHS_L_9.pdf, Composition="Thin Film", Device Class L1="Passive Components", Device Class L2=Resistors, Device Class L3="Chip SMD Resistors", Digikey Description="RES SMD 51K OHM 0.1% 1/8W 0805", Footprint Url=http://www.yageo.com/exep/pages/download/literatures/PYu-R_Mount_10.pdf, Height=0.6mm, Ipc Land Pattern Name=RESC200125X50, Lead Free=Yes, Manufacturer Part Number=RT0805BRD0751KL, Mouser Description="Thin Film Resistors - SMD 1/8W 51K ohm .1% 25ppm", Octopart=https://octopart.com/rt0805brd0751kl-yageo-1414977, RoHS=TRUE, Series=RT
R25: library part CMP-2001-00581-2, "RES 1K OHM 0.1% 1/8W 0805", Case Code (Imperial)=0805, Case Code (Metric)=2012, Max Operating Temperature=155°C, Max Power Dissipation=125mW, Min Operating Temperature=-55°C, Package Quantity=5000, Resistance=103R, Resistance Tolerance=0.1%, Resistor Type="Thin Film", Temperature Coefficient=25ppm/°C, Voltage Rating=100V, Case/Package=0805, Construction=Rectangular, Contact Plating=Tin, Depth=1.25mm, Height=0.5mm, Length=2mm, Military Standard=Not, Mount="Surface Mount", Number of Pins=2, Number of Terminations=2, Packaging="Tape and Reel", Power Rating=125mW, Radiation Hardening=No, REACH SVHC="No SVHC", RoHS Compliant=Yes, Series=ERA-6A, Technology="THIN FILM", Termination=SMD/SMT, Tolerance=0.1%, Width=1.25mm, Working Voltage=100V
T1: library part CMP-012-00000-5, "Power Transformers MID-L3798/99 Offline Isol 3.6uH +-10%", Current Rating=2A, Inductance=300uH, Max Operating Temperature=125°C, Min Operating Temperature=-40°C, Power=48W, Voltage Rating=265V, Mounting Technology=THT, Pins=10, RoHS Compliant=Yes, Turns Ratio=0.167372
U2: library part CMP-0319-00950-2, "Pulse-Width-Modulation Control Circuit with Voltage Control, 45 % Duty Cycle, 0 to +70 degC, 16-pin SOIC (D), Green (RoHS & no Sb/Br)", Frequency(Max)(kHz)=300, Manufacturer="Texas Instruments", Rating=Military, Code_JEDEC=MS-012AC, ComponentLink1Description=Datasheet, ComponentLink1URL=http://www.ti.com/general/docs/lit/getliterature.tsp?genericPartNumber=TL494&fileType=pdf, Control Method=Voltage, DatasheetVersion=SLVS074E, Duty Cycle(Max)(%)=45, Eco-Plan="Green (RoHS & no Sb/Br)", Mounting Technology="Surface Mount", PackageDescription="16-Pin Plastic Small Outline Integrated Circuit, 9.9 x 3.9 mm, Pitch 1.27 mm Pitch", PackageReference=D0016A, PackageVersion="revM, Jun-2011", PartNumber=TL494CDR, Regulated Outputs(#)=2, SubFamily="PWM Controller", Topology="Boost, Buck, Flyback, Forward, Full-Bridge, Half-Bridge, Push-Pull"

## Free pads (board coordinates)
  round 0.025 smd: 3(5.334,38.735)

## Via types
v1: diameter 1, hole 0.5, Top Layer to Bottom Layer, 125 vias
v2: diameter 2.032, hole 1.778, Top Layer to Bottom Layer, 14 vias
v3: diameter 1.5, hole 1, Top Layer to Bottom Layer, 6 vias
v4: diameter 4.5, hole 3.5, Top Layer to Bottom Layer, 5 vias
v5: diameter 1.016, hole 0.889, Top Layer to Bottom Layer, 4 vias
v6: diameter 1.143, hole 1, Top Layer to Bottom Layer, 2 vias
v7: diameter 0.75, hole 0.5, Top Layer to Bottom Layer, 1 vias
v8: diameter 1, hole 0.508, Top Layer to Bottom Layer, 1 vias

## Nets (pads, with @x,y where several pads share a name; then routed paths per layer and width w, separated by ;. In a path a pad name is that pad's centre, name@x,y a point inside that pad or via, vN(x,y) a via of type N, cw(c..) or ccw(c..) an arc to the next point about the centre after c; other vN are vias at no path point)
1IN+: R14.2 R16.2 U2.1 | length 34.1
  Top Layer w0.508: v1(59.944,91.567) 60.038,91.661 60.038,92.55 61.052,93.564 R14.2
  Top Layer w1.016: R14.2@62.484,93.537 62.489,93.542 66.162,93.542 R16.2
  Bottom Layer w0.508: U2.1 52.34,70.215 51.308,71.247 51.308,73.406 58.547,80.645 58.547,90.17 v1(59.944,91.567)
1IN-: R21.1 R23.2 U2.2 | length 26
  Bottom Layer w0.254: 50.292,62.23 52.451,62.23 52.959,62.738 52.959,64.643 53.61,65.294
  Bottom Layer w0.508: 50.292,62.23 48.26,62.23 45.72,59.69 45.72,57.658 46.736,56.642 R21.1 ; R23.2 52.671,71.986 53.61,71.047 U2.2 53.61,65.294
2IN+: J2.1 U2.16 | length 36.2
  Bottom Layer w0.508: U2.16 52.34,65.008 49.657,67.691 49.657,74.549 56.769,81.661 J2.1
2IN-: R20.1 R25.2 U2.15 | length 7.5
  Bottom Layer w0.508: R25.2@49.519,59.436 R20.1 52.319,59.486 53.61,60.777 U2.15
C1: R2.1 R15.1 U2.8 U2.11 | length 5.8
  Bottom Layer w0.508: U2.11 58.69,65.542 59.215,66.067 59.215,67.089 v1(59.309,67.183) ; U2.8 61.276,68.973 61.276,67.762 61.374,67.664 61.374,67.277 v1(61.468,67.183)
  other v1: 63.5,62.357 63.5,64.008 65.532,64.389 59.309,65.786 61.468,65.786 63.5,65.786 63.5,67.183
CT: C1.1 U2.5 | length 3.2
  Bottom Layer w0.508: C1.1@57.021,72.025 57.42,71.626 U2.5
DTC: C1.2 C2.1 C3.1 C4.2 C5.2 C6.2 C7.1 C8.1 D4.4 D5.2 J1.1 pad.3 R1.2 R19.1 R22.2 R25.1 T1.7 U2.4 U2.7 U2.9 U2.10 U2.13 | length 338.1
  Top Layer w0.254: 9.654,38.735 ccw(c5.334,38.735) 9.654,38.735
  Top Layer w0.508: R19.1 69.977,93.538 v1(69.977,91.821) ; D5.2 74.454,88.011 v1(76.708,88.011) ; v1(76.708,55.245) 76.708,55.112 77.252,54.568 C3.1
  Top Layer w1.524: v1(49.53,64.897) D4.4
  Top Layer w3.048: v4(5.334,38.735) 5.612,38.457 5.612,34.424 5.612,32.869 7.676,30.805 J1.1 18.899,30.805 C7.1 28.241,21.463 v2(36.449,21.463)
  Layer 1 w0.254: 13.716,46.355 ccw(c12.446,46.355) 12.446,47.625 1.016,47.625 1.016,7.659 ccw(c1.023,7.659) 1.023,7.652 cw(c5.207,4.953) 7.731,0.661 79.87,0.661 ccw(c79.87,0.769) 79.978,0.769 cw(c82.677,4.953) 86.969,7.477 86.995,29.845 86.995,32.004 ccw(c85.725,32.004) 85.725,33.274
  Bottom Layer w0.508: v1(42.291,53.594) 46.731,53.594 R22.2 ; v1(46.99,58.166) 47.003,58.166 48.144,59.307 R25.1 ; v1@55.888,74.033 v1(55.88,74.041) 55.88,71.211 56.15,70.941 U2.4 ; U2.13 56.196,63.523 56.196,62.422 v7(57.15,61.468) ; C1.2@57.396,74.033 C1.2 v1(57.404,75.565) ; C2.1 57.495,56.515 v1(59.309,56.515) ; R1.2 v1(59.563,75.565) ; v1(59.817,61.468) 59.817,61.533 59.96,61.676 U2.10 ; U2.7 59.981,69.04 59.981,70.054 60.572,70.645 60.993,70.645 v1(61.087,70.739) ; U2.9 61.23,61.644 61.341,61.533 v1(61.341,61.468)
  Bottom Layer w3.048: v2(36.449,21.463) 41.402,26.416 74.977,26.416 C8.1
  other v1: 10.541,2.032 14.859,2.032 19.812,2.032 24.765,2.159 28.575,2.159 32.004,2.159 35.814,2.159 65.532,2.159 69.342,2.159 73.66,2.159 2.286,12.954 85.09,13.462 2.286,17.272 85.09,17.907 2.286,21.082 85.09,22.225 2.286,25.019 85.09,26.924 2.286,28.829 85.09,31.242 17.653,31.369 22.479,31.369 26.924,31.369 32.385,31.369 36.957,31.369 41.529,31.369 45.847,31.369 50.419,31.369 54.991,31.369 59.817,31.369 64.516,31.369 69.342,31.369 73.533,31.369 81.915,31.369 2.286,31.877 12.065,35.687 11.938,39.37 12.065,42.799 77.343,44.704 12.065,45.974 2.286,46.101 5.715,46.101 9.017,46.101 30.099,46.355 71.374,47.244 52.324,49.784 69.088,51.054 33.274,51.308 62.992,52.832 28.956,53.467 38.354,54.864 70.993,54.864 66.294,56.642 34.163,56.896 62.484,59.055 74.803,59.69 70.104,59.817 28.067,60.198 45.085,62.992 76.581,63.627 70.462,66.952 28.067,67.564 32.131,68.072 45.339,68.453 66.421,71.628 30.734,73.152 27.813,76.962 76.835,78.326 46.355,79.629 31.369,82.423 41.402,83.82 35.941,84.201 68.326,86.233 63.881,86.741 29.337,87.249 34.925,88.646 61.214,89.789 66.929,89.789 77.343,91.44 34.163,93.091 59.182,94.488 73.787,94.742 74.295,98.171 29.591,98.298 35.179,98.679 64.262,98.679 69.723,99.06
  other v3: 31.957,63.627 32.084,77.089 29.337,92.329
  other v5: 70.612,87.63
FB: R23.1 U2.3 | length 3.2
  Bottom Layer w0.508: R23.1 54.834,72.073 54.834,69.065 U2.3
NetC7_2: C7.2 C9.Pad5 J1.2 R3.2 T1.4 | length 56.9
  Top Layer w3.048: J1.2 12.192,27.305 C7.2@25.955,13.542 ; C7.2 44.53,13.542 47.643,16.655 v1@47.643,16.782 ; v1(47.56,16.738) 47.599,16.738 v1(49.022,18.161) 49.149,18.161 v1(50.546,19.558) v2(52.324,21.336)
  Bottom Layer w3.048: 51.435,16.764 51.943,17.272 v6(57.15,17.272)
NetC8_2: C8.2 C9.Pad6 F2.1 R3.1 T1.2 | length 20.3
  Top Layer w3.048: v2(62.23,21.463) 62.23,19.685 68.5,13.415 C8.2
  Bottom Layer w3.048: C9.Pad6@57.023,2.413 v6(57.15,2.286)
  other v1: 62.357,19.05
NetD1_2: D1.2 T1.6 | length 53.7
  Top Layer w1.7: v2(42.164,21.463) 47.016,26.315 70.532,26.315 77.851,33.634 77.851,39.497 74.93,42.418 D1.2
NetF1_1: F1.1 J1.3 | length 25
  Top Layer w3.048: J1.3 10.287,9.271 13.843,5.715 16.82,5.715 F1.1@19.264,5.715
  other v1: 16.82,5.559
NetQ2_1: Q2.1 R15.2 | length 22.3
  Top Layer w1.016: R15.2 69.788,62.484 75.977,68.673 75.977,76.621 75.382,77.216 Q2.1
NetR16_1: R16.1 R19.2 | length 3.7
  Top Layer w1.016: R16.1@66.167,95.565 R19.2
NetR18_1: R18.1 R21.2 R22.1 | length 5.9
  Bottom Layer w0.508: R22.1 R18.1 52.439,53.841 R21.2
rect+: C4.1 C5.1 D4.1 Q2.3 R2.2 | length 36.9
  Top Layer w1.016: R2.2 70.231,69.469 Q2.3
  Top Layer w1.27: D4.1@55.429,69.469 R2.2
  Top Layer w2.032: 41.529,77.216 45.847,72.898 53.086,72.898 54.553,71.431 54.553,68.764 D4.1
  other v3: 36.957,63.627 37.084,77.089
REF: R18.2 R20.2 U2.14 | length 9.9
  Bottom Layer w0.508: R18.2 R20.2 54.88,59.447 U2.14
RT: R1.1 U2.6 | length 3.4
  Bottom Layer w0.508: U2.6 58.69,71.277 59.438,72.025 R1.1
sec+: D4.2 T1.12 T1.13 T1.14 | length 26.5
  Top Layer w2.032: 54.737,51.181 57.023,48.895 58.119,48.895 59.309,47.705 59.309,46.863
  Top Layer w2.794: 54.737,51.181 D4.2 ; v2(57.277,46.863) 59.309,46.863 v2(62.23,46.863) 62.357,46.736 v2(67.183,46.736)
sec-: D4.3 T1.8 T1.9 T1.10 | length 19.2
  Top Layer w2.794: v2(41.91,46.609) 44.958,46.609 49.53,51.181 D4.3
  other v2: 47.371,46.609 36.703,46.736
sw-node: D5.1 L4.1 Q2.2 | length 0.4
  Top Layer w1.27: v5(61.722,82.169) ccw(c61.849,82.169) L4.1@61.849,82.042
  Top Layer w5.08: L4.1@61.595,82.042 cw(c61.722,82.042) v5(61.722,82.169)
VCC: C2.2 C3.2 D1.1 U2.12 | length 29.5
  Top Layer w0.508: v8(59.436,58.42) 65.151,52.705 C3.2 74.93,52.233 D1.1
  Bottom Layer w0.508: U2.12 57.466,63.523 57.466,62.676 58.039,62.103 58.039,60.268 57.466,59.695 57.466,58.518 C2.2 57.44,58.42 v8(59.436,58.42)
vout: C6.1 J2.2 L4.0 R14.1 | length 13.2
  Top Layer w1.016: J2.2 53.269,98.084 53.864,98.679 59.32,98.679 62.333,95.666 R14.1
  Top Layer w5.08: L4.0@50.165,82.042 cw(c50.292,82.042) v5(50.292,82.169)
  other v3: 41.656,92.329
  other v5: 48.514,87.63
pads on no net: T1.1 T1.3 T1.5 T1.11
copper on no net:
  other v1: 79.883,34.417 75.819,35.052 79.883,36.83 75.946,37.338 79.883,39.116 75.311,39.497 73.787,40.767 78.994,41.275 73.025,42.545 77.724,42.545
  other v2: 47.117,21.336 57.15,21.336 67.31,21.336 52.324,46.863
  other v4: 82.804,4.826 5.207,4.953 5.207,96.393 82.677,96.393

## Polygon pours and split planes (outlines as drawn)
sw-node on Top Layer "NetC24_2_P" (solid, remove dead copper, pour order 2): 74.168,74.915 ccw(c73.338,74.915) 73.925,75.501 ccw(c73.158,74.735) 73.158,75.819 70.606,75.819 cw(c70.606,77.337) 69.532,76.263 cw(c70.606,77.337) 69.088,77.337 69.088,77.343 69.088,79.756 69.088,80.36 cw(c70.389,80.36) 69.469,81.28 69.532,81.343 cw(c70.606,80.271) 70.606,81.788 75.28,81.788 ccw(c75.28,83.089) 76.2,82.169 76.263,82.232 ccw(c75.191,83.305) 76.708,83.306 76.708,84.895 ccw(c75.624,84.895) 76.39,85.661 ccw(c75.624,84.895) 75.624,85.979 73.406,85.979 ccw(c73.406,84.139) 72.105,85.44 72.003,85.338 cw(c70.485,86.855) 70.485,84.709 62.865,84.709 60.483,84.709 ccw(c60.482,83.41) 59.563,84.328 59.291,84.056 ccw(c61.086,82.26) 58.547,82.26 58.547,80.264 58.547,79.226 ccw(c59.414,79.226) 58.801,78.613 63.309,74.104 63.465,73.949 ccw(c64.516,75) 64.516,73.514 65.792,73.514 ccw(c65.121,75.752) 65.853,73.533 73.246,73.533 ccw(c73.246,74.571) 73.98,73.837 ccw(c73.338,74.363) 74.168,74.363
rect+ on Top Layer "NetC24_2_P" (solid, remove dead copper, pour order 4): 48.786,74.658 ccw(c50.582,76.454) 50.582,73.914 50.673,73.914 50.673,71.882 44.45,71.882 ccw(c44.45,69.85) 42.418,69.85 42.418,59.944 cw(c41.275,59.944) 41.275,58.801 36.068,58.801 cw(c36.195,59.69) 35.306,59.817 35.306,76.454 35.306,76.99 cw(c37.691,76.99) 36.005,78.676 38.245,80.917 cw(c40.041,79.121) 40.041,81.661 40.731,81.661 cw(c40.731,79.121) 42.527,80.917
vout on Top Layer "NetC24_2_P" (solid, remove dead copper, pour order 3): 48.024,80.246 ccw(c49.82,82.042) 49.82,79.502 52.705,79.502 ccw(c52.705,81.788) 54.991,81.788 54.991,96.52 cw(c56.642,96.52) 56.642,98.171 57.023,98.171 ccw(c57.023,98.425) 57.277,98.425 57.277,99.06 ccw(c57.15,99.06) 57.15,99.187 38.608,99.187 ccw(c38.608,98.171) 37.592,98.171 37.592,90.678
C1 on Top Layer "NetC24_2_P" (solid, remove dead copper, pour order 0): 66.421,61.341 62.484,61.341 62.484,64.77 58.293,64.77 58.293,68.072 66.421,68.072
sec- on Top Layer "NetC24_2_P" (solid, remove dead copper, pour order 6): 47.665,57.488 ccw(c46.536,58.617) 48.133,58.617 48.133,59.055 50.292,59.055 cw(c49.985,58.748) 50.419,58.748 50.419,58.166 50.419,50.673 cw(c48.886,50.673) 49.97,49.589 49.508,49.127 ccw(c50.375,48.26) 49.149,48.26 49.149,45.751 cw(c47.848,45.751) 48.768,44.831 48.387,44.45 cw(c47.467,45.37) 47.467,44.069 37.592,44.069 37.421,44.069 cw(c37.421,45.803) 36.195,44.577 35.687,45.085 cw(c36.607,46.005) 35.306,46.005 35.306,47.833 cw(c37.257,47.833) 35.877,49.212 36.449,49.784 36.508,49.843 cw(c37.592,48.759) 37.592,50.292 39.243,50.292 39.341,50.292 ccw(c39.341,51.97) 40.528,50.784
sec+ on Top Layer "NetC24_2_P" (solid, remove dead copper, pour order 5): 56.602,57.488 cw(c57.731,58.617) 56.134,58.617 56.134,58.928 53.848,58.928 53.848,50.038 54.483,49.403 54.579,49.307 cw(c53.278,48.006) 55.118,48.006 55.118,45.93 ccw(c56.852,45.93) 55.626,44.704 55.722,44.608 ccw(c57.023,45.909) 57.023,44.069 66.957,44.069 ccw(c66.957,45.534) 67.993,44.498 68.422,44.927 ccw(c67.122,46.228) 68.961,46.228 68.961,47.833 ccw(c67.01,47.833) 68.389,49.212 68.054,49.548 ccw(c66.258,47.752) 66.258,50.292 65.102,50.292 cw(c65.102,52.416) 63.6,50.914
NetC8_2 on Bottom Layer "NetC24_2_P" (solid, remove dead copper, pour order 11): 53.848,9.398 cw(c52.315,10.931) 52.315,8.763 38.608,8.763 ccw(c38.608,8.001) 37.846,8.001 37.846,3.429 ccw(c38.481,3.429) 38.481,2.794 39.287,2.794 cw(c39.287,1.06) 40.513,2.286 41.281,1.518 ccw(c42.799,3.035) 42.799,0.889 62.992,0.889 ccw(c62.992,1.778) 63.881,1.778 63.881,22.479 ccw(c63.119,22.479) 63.119,23.241 61.087,23.241 ccw(c61.087,22.479) 60.325,22.479 60.325,16.593 cw(c58.591,16.593) 59.817,15.367
C1 on Bottom Layer "NetC24_2_P" (solid, remove dead copper, pour order 1): 66.548,68.072 66.421,67.945 66.421,61.341 62.484,61.341 62.484,64.77 58.293,64.77 58.293,68.072
NetC7_2 on Bottom Layer "NetC24_2_P" (solid, remove dead copper, pour order 10): 50.99,22.288 51.674,22.972 cw(c52.324,22.321) 52.324,23.241 53.467,23.241 cw(c53.467,22.479) 54.229,22.479 54.229,19.939 ccw(c54.991,19.939) 54.991,19.177 58.039,19.177 cw(c58.039,18.415) 58.801,18.415 58.801,16.51 cw(c57.881,16.51) 58.532,15.86 53.068,10.396 cw(c51.272,12.192) 51.272,9.652 48.127,9.652 cw(c48.127,11.17) 47.053,10.096 cw(c48.127,11.17) 46.609,11.17 46.609,16.637 46.609,17.099 cw(c48.56,17.099) 47.18,18.479 50.419,21.717
NetF1_1 on Bottom Layer "NetC24_2_P" (solid, remove dead copper, pour order 12): 13.081,3.556 ccw(c13.843,3.556) 13.843,2.794 19.939,2.794 ccw(c19.939,3.429) 20.574,3.429 20.574,8.255 ccw(c19.812,8.255) 19.812,9.017 13.716,9.017 ccw(c13.716,8.382) 13.081,8.382
DTC on Layer 2 "NetC24_2_P" (solid, remove dead copper, pour order 8): 26.289,100.508 78.486,100.508 78.486,43.18 26.289,43.18
DTC on Layer 2 "NetC24_2_P" (solid, remove dead copper, pour order 18): 0.987,7.634 cw(c0.987,7.641) 0.979,7.641 0.979,47.607 12.409,47.607 cw(c12.409,46.337) 13.679,46.337 13.679,34.526 ccw(c14.949,34.526) 14.949,33.256 85.688,33.256 cw(c85.688,31.986) 86.958,31.986 86.958,29.827 86.932,7.459 ccw(c82.64,4.935) 79.941,0.751 cw(c79.834,0.751) 79.834,0.643 7.695,0.643 ccw(c5.17,4.935)
DTC on Layer 1 "NetC24_2_P" (solid, remove dead copper, pour order 7): 26.162,100.508 78.486,100.508 78.486,43.18 26.162,43.18
DTC on Layer 1 "NetC24_2_P" (solid, remove dead copper, pour order 17): 1.023,7.652 cw(c1.023,7.659) 1.016,7.659 1.016,47.625 12.446,47.625 cw(c12.446,46.355) 13.716,46.355 13.716,34.544 ccw(c14.986,34.544) 14.986,33.274 85.725,33.274 cw(c85.725,32.004) 86.995,32.004 86.995,29.845 86.969,7.477 ccw(c82.677,4.953) 79.978,0.769 cw(c79.87,0.769) 79.87,0.661 7.731,0.661 ccw(c5.207,4.953)

## Other copper
Top Layer:
  region net DTC: 5.334,34.415 cw(c5.334,38.735) 1.014,38.735 cw(c5.334,38.735) 5.334,43.055 cw(c5.334,38.735) 9.654,38.735 cw(c5.334,38.735)

## Silkscreen, mask and mechanical layers (free items; w line width, h text height)
Top Overlay:
  drawing of 11 lines, arcs and shapes, not listed
  text "21-OCT-2023" at 13.781,75.436 h2.5 r90
  text "TEST BOARD" at 11.114,66.289 h2.5 r90
  text "SMPS V1" at 14.035,66.294 h2.5 r90
  text "IN: 125 VAC" at 16.829,66.292 h2.5 r90
  text "OUT: 24 VDC @ 1.5 A" at 19.631,66.167 h2.5 r90
  text "AC-DC24" at 7.722,65.126 h5 r90
  text "EARTH" at 2.969,43.99 h1.02
  text "20mm" at 27.43,6.475 h1.02
  text "250VAC   3A" at 23.493,3.427 h1.02
Bottom Overlay:
  text "M3 (1/8\")" at 11.351,98.092 h1.02
Mechanical 1:
  lines w0.102: 0,0 88.011,0 ; 0,101.346 88.011,101.346 ; 30.607,36.322 73.228,36.322 ; 30.607,39.599 73.228,39.599
  lines w0.127: 0,0 0,53.721 0.051,53.721 ccw(c0.079,56.721) 0.02,59.72 0,59.72 0,101.346 ; 30.607,36.322 cw(c30.81,37.96) 30.607,39.599 ; 73.228,36.322 ccw(c72.626,37.96) 73.228,39.599 ; 88.011,0 88.146,0 88.146,53.721 ; 88.011,53.721 88.146,53.721 ; 88.011,101.346 88.011,59.721 88.115,59.721 ccw(c88.087,56.721) 88.146,53.721